# EAGLE board Door-inner-V0 (EAGLE 9.2.0)
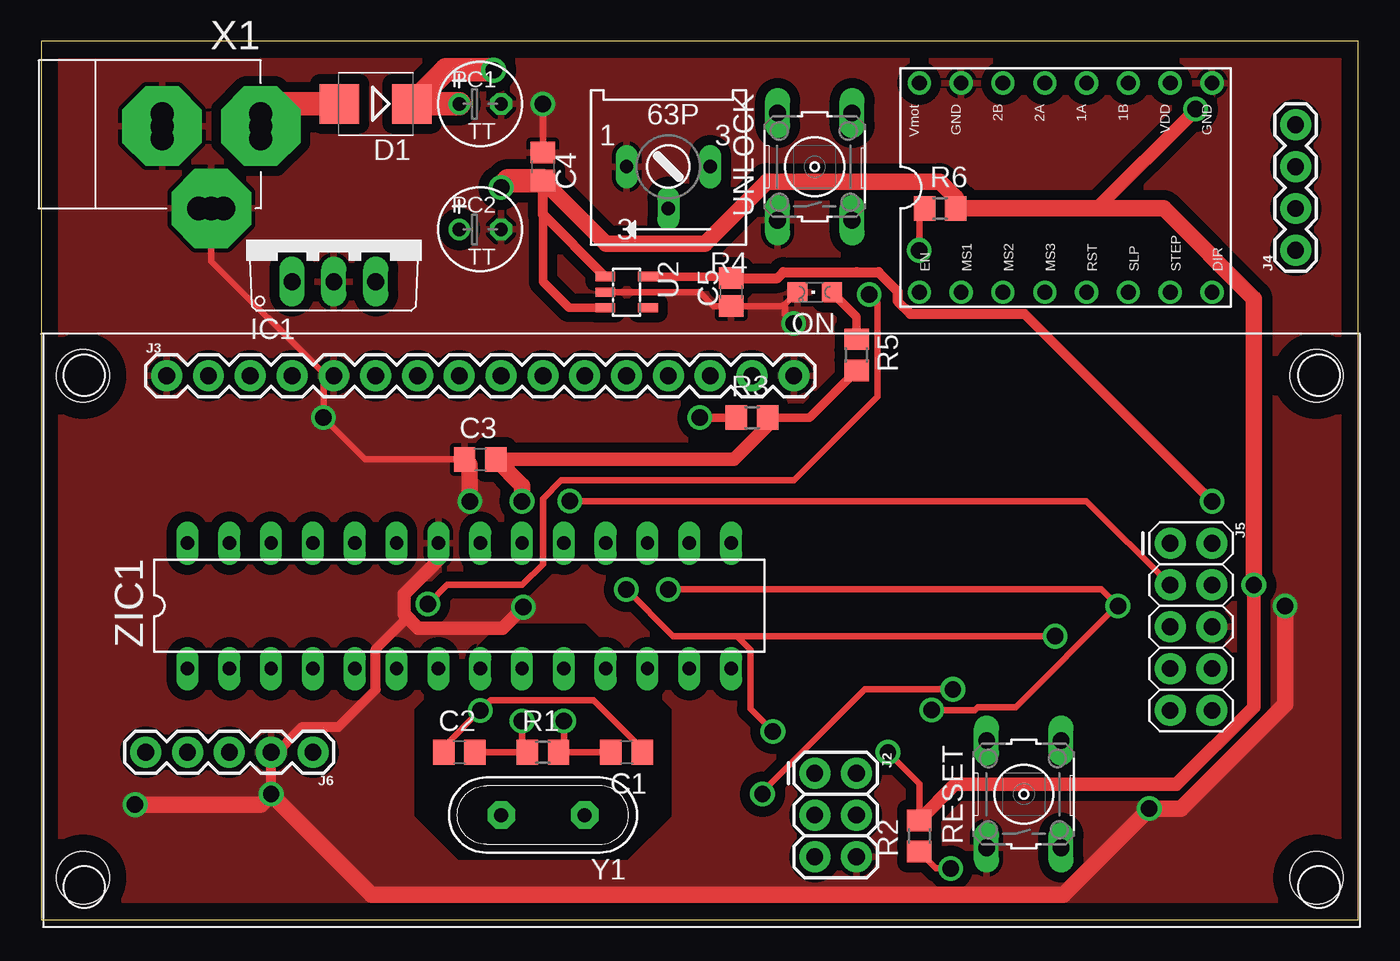
[diagram p0: board, top side]
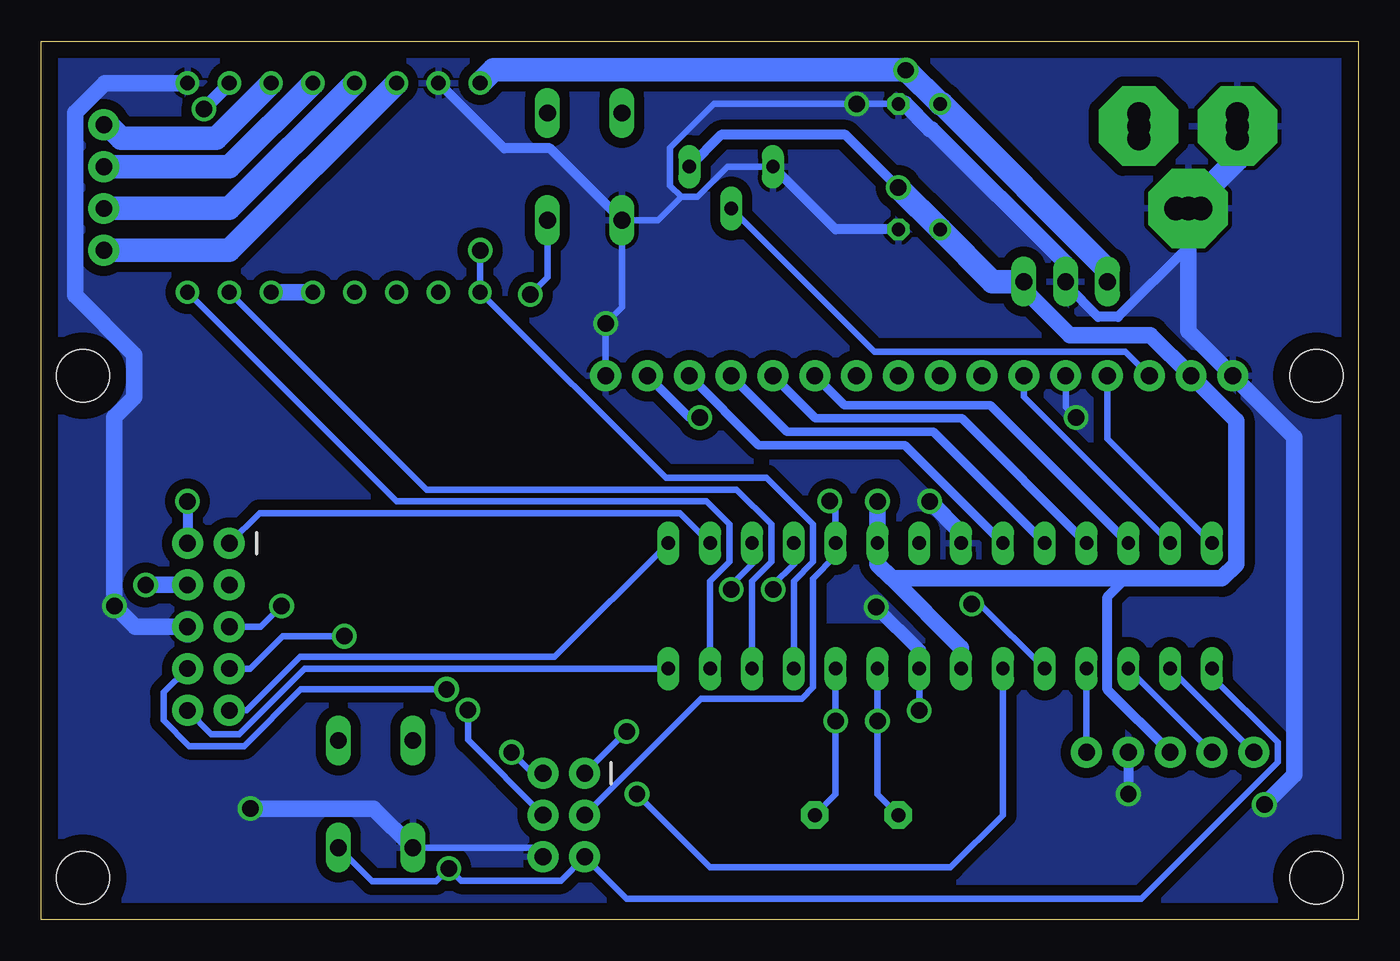
[diagram p1: board, bottom side, seen from below]

Size 80.01 x 53.34 mm. Coordinates in mm from the lower left corner, seen from the top.
Outline: 0,0 80.01,0 80.01,53.34 0,53.34 0,0
Copper layers (1*16): Top 0.035mm / dielectric 1.5mm / Bottom 0.035mm
Design rules "default *": minimum track width 16mil, minimum drill 0.4mm, track to track 12mil, track to pad 12mil, pad to pad 12mil, via to via 12mil, smd to smd 12mil, copper to edge 40mil, drill to drill 6mil, minimum pad ring 10mil, minimum via ring 8mil, stop-mask expansion 4mil, vias tented up to drill 0mil, thermal gap 10mil
Net classes: 1 power: width 0.406 mm; 2 gnd: width 0.406 mm; 3 vin: width 1.422 mm
Holes 3.2 mm at 77.47,33.02 77.47,2.54 2.54,2.54 2.54,33.02

## Footprints (pad centres in the part's own frame; a part is rotated, then mirrored left to right if it is on the bottom)
C0805 = smd 1.3 x 1.5: 1 -0.95,0; 2 0.95,0
C0805' = smd 1.3 x 1.5: 1 -0.85,0; 2 0.85,0
SMB = smd 2.4 x 2.4: A 2.2,0; C -2.2,0
TO220V = drill 1.016 long: 1 -2.54,-2.54; 2 0,-2.54; 3 2.54,-2.54
2X3 = drill 1.016 pad 1.88: 1 0,0; 2 0,2.54; 3 2.54,0; 4 2.54,2.54; 5 5.08,0; 6 5.08,2.54
LCD-16X2 = drill 1.016 pad 1.88: 1 0,0; 2 2.54,0; 3 5.08,0; 4 7.62,0; 5 10.16,0; 6 12.7,0; 7 15.24,0; 8 17.78,0; 9 20.32,0; 10 22.86,0; 11 25.4,0; 12 27.94,0; 13 30.48,0; 14 33.02,0; 15 35.56,0; 16 38.1,0
1X04 = drill 1.016 pad 1.88: 1 0,0; 2 2.54,0; 3 5.08,0; 4 7.62,0
2X5 = drill 1.016 pad 1.88: 1 0,0; 2 0,2.54; 3 2.54,0; 4 2.54,2.54; 5 5.08,0; 6 5.08,2.54; 7 7.62,0; 8 7.62,2.54; 9 10.16,0; 10 10.16,2.54
1X05 = drill 1.016 pad 1.88: 1 0,0; 2 2.54,0; 3 5.08,0; 4 7.62,0; 5 10.16,0
CHIPLED_0805 = smd 1.2 x 1.2: A 0,-1.05; C 0,1.05
TT2D5 = drill 0.813: + -1.27,0 | drill 0.813 octagon: - 1.27,0
R0805 = smd 1.3 x 1.5: 1 -0.95,0; 2 0.95,0
S63P = drill 0.813 long: A 2.54,0; E -2.54,0; S 0,2.54
B3F-10XX = drill 1.016 long: 1 -3.251,2.261; 2 3.251,2.261; 3 -3.251,-2.261; 4 3.251,-2.261
SOT23-DBV = smd 0.55 x 1.2: 1 -0.95,-1.3; 2 0,-1.3; 3 0.95,-1.3; 4 0.95,1.3; 5 -0.95,1.3
A4988BREAKOUT = drill 0.9: 1A 8.89,1.27; 1B 11.43,1.27; 2A 6.35,1.27; 2B 3.81,1.27; DIR 16.51,-11.43; EN -1.27,-11.43; GND 16.51,1.27; GND@0 1.27,1.27; MS1 1.27,-11.43; MS2 3.81,-11.43; MS3 6.35,-11.43; RST 8.89,-11.43; SLP 11.43,-11.43; STEP 13.97,-11.43; VDD 13.97,1.27; VMOT -1.27,1.27
POWERSUPPLY_DC-21MM = drill 1.4 pad 4.826 octagon: 1 -5.08,-3.353; 2 -0.076,-6.35; 3 -0.076,-0.356 | drill 1.4: 4 -5.08,-4.115; 5 -5.08,-2.591; 6 -0.838,-0.356; 7 0.686,-0.356; 8 -0.838,-6.35; 9 0.686,-6.35
QS = drill 0.85 pad 1.676 octagon: 1 -2.54,0; 2 2.54,0
DIL28-3 = drill 0.813 long: 1 -16.51,-3.81; 2 -13.97,-3.81; 3 -11.43,-3.81; 4 -8.89,-3.81; 5 -6.35,-3.81; 6 -3.81,-3.81; 7 -1.27,-3.81; 8 1.27,-3.81; 9 3.81,-3.81; 10 6.35,-3.81; 11 8.89,-3.81; 12 11.43,-3.81; 13 13.97,-3.81; 14 16.51,-3.81; 15 16.51,3.81; 16 13.97,3.81; 17 11.43,3.81; 18 8.89,3.81; 19 6.35,3.81; 20 3.81,3.81; 21 1.27,3.81; 22 -1.27,3.81; 23 -3.81,3.81; 24 -6.35,3.81; 25 -8.89,3.81; 26 -11.43,3.81; 27 -13.97,3.81; 28 -16.51,3.81

## Placement (x,y rotation side)
C1  22p  [C0805]  35.56,10.16 180 top
C2  22p  [C0805]  25.4,10.16 0 top
C3  100n  [C0805]  26.67,27.94 0 top
C4  100n  [C0805']  30.48,45.72 270 top
C5  1u  [C0805']  41.91,38.1 90 top
D1  M7  [SMB]  20.32,49.53 180 top
IC1  7815TV  [TO220V]  17.78,41.27 0 top
J2  AVR_SPI_PROG_3X2PTH  [2X3]  46.99,8.89 270 top
J3  LCD_4PIN  [LCD-16X2]  7.62,33.02 0 top
J4  [1X04]  76.2,40.64 90 top
J5  [2X5]  68.58,22.86 270 top
J6  [1X05]  16.51,10.16 180 top
ON  [CHIPLED_0805]  46.99,38.1 90 top
PC1  47u  [TT2D5]  26.67,49.53 0 top
PC2  47u  [TT2D5]  26.67,41.91 0 top
R1  1M  [R0805]  30.48,10.16 0 top
R2  10k  [R0805]  53.34,5.08 90 top
R3  220  [R0805]  43.18,30.48 0 top
R4  [S63P]  38.1,45.72 180 top
R5  470  [R0805]  49.53,34.29 270 top
R6  10k  [R0805]  54.61,43.18 0 top
RESET  [B3F-10XX]  59.69,7.62 90 top
U2  LP2985-33DBVR  [SOT23-DBV]  35.56,38.1 270 top
U$1  A4988BREAKOUT  [A4988BREAKOUT]  54.61,49.53 0 top
UNLOCK  [B3F-10XX]  46.99,45.72 90 top
X1  POWERSUPPLY_DC21MMX  [POWERSUPPLY_DC-21MM]  6.99,48.26 90 top
Y1  16MHz  [QS]  30.48,6.35 180 top
ZIC1  ATMEGA8  [DIL28-3]  25.4,19.05 0 top

## Library data of the parts
C1-C3 R1-R3 R5 R6 = resistor
C4 C5 X1 Y1 = SmartPrj
D1 = diode
IC1 = linear
J2 J6 = SparkFun-Connectors
J3 = lcd
J4 = SparkFun-Connectors; PROD_ID: CONN-09696
J5 = SparkFun-Connectors; PROD_ID: CONN-08499; SF_ID: PRT-0778
ON = led
PC1 PC2 = rcl
R4 = pot
RESET UNLOCK = switch-omron; MPN: B3F-1000; OC_FARNELL: 176432; OC_NEWARK: 36M3542
U2 = texas
U$1 = RepRapjr
ZIC1 = atmel

## Nets
+3V3: C5.2 J5.2 U2.5
+5V [power]: C3.2 C4.2 IC1.3 J2.2 J3.2 J5.4 J6.3 PC2.+ R2.2 R3.2 R4.E R5.2 R6.2 U2.1 U2.3 U$1.VDD ZIC1.7 ZIC1.20
BUZ: J5.10 ZIC1.14
D4: J3.11 ZIC1.26
D5: J3.12 ZIC1.25
D6: J3.13 ZIC1.24
D7: J3.14 ZIC1.23
GND [gnd]: C1.1 C2.1 C3.1 C4.1 C5.1 IC1.2 J2.6 J3.1 J3.5 J3.16 J5.6 J6.2 ON.C PC1.- PC2.- R4.A RESET.1 U2.2 U$1.GND U$1.GND@0 UNLOCK.1 X1.1 X1.3 ZIC1.8 ZIC1.22
LCD-EN: J3.6 ZIC1.27
LCD-RS: J3.4 ZIC1.28
M-DIR: U$1.DIR ZIC1.13
M-EN: R6.1 U$1.EN ZIC1.11
M-STP: U$1.STEP ZIC1.12
MISO: J2.1 J5.7 ZIC1.18
MOSI: J2.4 J5.5 ZIC1.17
N$1: J6.1 ZIC1.4
N$2: J6.4 ZIC1.3
N$3: J6.5 ZIC1.2
N$4: J3.15 R3.1
N$5: J3.3 R4.S
N$6: ON.A R5.1
N$7: U$1.RST U$1.SLP
N$8: J4.1 U$1.2B
N$9: J4.2 U$1.2A
N$10: J4.3 U$1.1A
N$11: J4.4 U$1.1B
N$12: UNLOCK.3 ZIC1.5
PWRIN [vin]: D1.A X1.2
RESET: J2.5 R2.1 RESET.3 ZIC1.1
RST: J5.9 ZIC1.15
SCK: J2.3 J5.3 ZIC1.19
SDA: J5.1 ZIC1.16
STATUS: J5.8 ZIC1.6
VIN [vin]: D1.C IC1.1 PC1.+ U$1.VMOT
XTAL1: C2.2 R1.1 Y1.2 ZIC1.9
XTAL2: C1.2 R1.2 Y1.1 ZIC1.10

## Tracks (layer width: path | path; a pad name or v marks a point on that pad's centre or on a via)
+3V3  (via drill 1 pad 0.6)
  Top 0.508: U2.5 41.81,39.05 C5.2
  Top 0.61: C5.2 44.73,38.95 45.09,39.31 49.53,39.31 50.86,39.31 52.03,38.14 52.03,37.56 52.8,36.79 59.73,36.79 v71.12,25.4
  Bottom 0.61: v71.12,25.4 J5.2
+5V  (via drill 1, 1 pad 0.6)
  Top 0.406: R2.2 53.34,8.25 v51.44,10.16
  Top 0.508: U2.3 32.06,37.15 30.48,38.73 30.48,42.83 | R3.2 46.67,30.48 R5.2
  Top 0.61: U2.1 30.48,42.83 C4.2
  Top 0.813: 64.14,43.18 69.97,49.02 69.97,49.06 v70.12,49.21 | R3.2 44.13,29.97 42.1,27.94 C3.2 | v73.66,20.32 73.66,12.9 68.96,8.2 55.51,8.2 R2.2
  Top 1.016: v29.21,25.4 29.21,26.35 C3.2 | C4.2 34.3,41.05 40.32,41.05 44.08,44.81 54.58,44.81 55.56,43.83 R6.2 64.14,43.18 68.19,43.18 73.66,37.7 v73.66,20.32
  Top 1.422: v27.94,44.45 28.36,44.87 C4.2
  Bottom 0.406: v51.44,10.16 50.16,8.89 J2.2
  Bottom 0.61: v27.94,44.45 31.14,47.65 38.71,47.65 R4.E | 14.12,20.73 15.24,19.6 15.24,13.97 J6.3
  Bottom 0.813: v70.12,49.21 68.58,50.76 U$1.VDD
  Bottom 1.016: v29.21,25.4 ZIC1.20 29.21,21.59 28.35,20.73 | ZIC1.7 24.13,16.51 28.35,20.73 | IC1.3 20.32,38.29 17.52,35.48 12.62,35.48 J3.2 7.42,30.28 7.42,21.59 8.28,20.73 14.12,20.73 28.35,20.73 | v73.66,20.32 J5.4
  Bottom 1.422: IC1.3 22.23,38.73 PC2.+ v27.94,44.45
BUZ
  Bottom 0.406: ZIC1.14 63.99,15.24 67.98,11.25 69.67,11.25 J5.10
D4
  Bottom 0.508: ZIC1.26 22.35,31.24 31.22,31.24 32.99,33.02 J3.11
D5
  Bottom 0.508: ZIC1.25 24.08,30.43 32.97,30.43 J3.12
D6
  Bottom 0.508: ZIC1.24 25.81,29.62 34.7,29.62 J3.13
D7
  Bottom 0.508: ZIC1.23 27.53,28.8 36.42,28.8 J3.14
GND  (via drill 1, 1 pad 0.6)
  Top 0.406: C1.1 36.51,10.38 33.55,13.34 27.3,13.34 v26.67,12.7 24.45,10.48 C2.1 | C3.1 19.68,27.94 v17.14,30.48 17.14,33.16 10.34,39.97 X1.1 | C4.1 v30.48,49.53 | 45.2,37.35 45.09,37.25 C5.1 40.85,37.25 40.01,38.1 U2.2 | 45.2,37.35 ON.C | 45.2,37.35 45.2,36.72 v45.72,36.2
  Top 0.61: v13.97,7.62 13.97,9.81 15.87,11.71 18.06,11.71 20.32,13.97 20.32,16.43 22.03,18.14 22.03,19.05
  Top 0.813: ZIC1.22 24.13,21.87 22.03,19.77 22.03,19.05 22.03,18.56 22.89,17.7 28.02,17.7 v29.29,18.97
  Top 1.016: v26.04,25.4 26.04,27.62 C3.1 | v5.71,6.98 13.34,6.98 v13.97,7.62 20.07,1.52 62.09,1.52 v67.31,6.74 69.22,6.74 75.56,13.09 v75.56,19.05
  Bottom 0.406: J3.5 17.78,31.12 v17.14,30.48 | PC1.- v30.48,49.53 39.14,49.53 41.81,46.86 41.81,44.58 41.12,43.89 | 41.12,43.89 40.16,43.89 38.33,45.72 R4.A | 41.12,43.89 42.55,42.47 UNLOCK.1 44.73,37.19 v45.72,36.2 J3.16 | v26.67,12.7 ZIC1.8 | J2.6 50.09,4.37 RESET.1
  Bottom 0.61: J6.2 v13.97,7.62 | PC2.- 31.75,41.91 R4.A | UNLOCK.1 49.1,46.84 51.88,46.84 55.84,50.8 U$1.GND@0 | IC1.2 17.78,38.57 15.81,36.6 14.61,36.6 10.34,40.87 X1.1
  Bottom 0.813: ZIC1.8 26.67,16.35 v29.29,18.97
  Bottom 1.016: ZIC1.22 24.13,23.49 v26.04,25.4 | IC1.2 17.78,39.86 25.93,48.01 26.03,48.01 27.55,49.53 PC1.- | U$1.GND 76.14,50.8 77.95,48.99 77.95,37.92 74.35,34.31 74.35,31.73 75.56,30.51 v75.56,19.05 74.3,17.78 J5.6 | X1.1 10.34,35.74 J3.1 3.89,29.29 3.89,8.8 v5.71,6.98 | RESET.1 59.8,6.74 v67.31,6.74
  Bottom 1.422: X1.1 7.34,46.18 X1.3
  cutout Bottom (rank 2): 25.4,3.81 22.86,6.35 22.86,12.7 27.94,17.78 33.02,17.78 38.1,12.7 38.1,6.35 35.56,3.81
  pour Bottom (isolate 0.61): 0,1.27 1.27,0 78.74,0 80.01,1.27 80.01,52.07 78.74,53.34 1.27,53.34 0,52.07
  pour Top (isolate 0.61): 0,1.27 1.27,0 78.74,0 80.01,1.27 80.01,52.07 78.74,53.34 1.27,53.34 0,52.07
  cutout Top (rank 2): 25.4,3.81 22.86,6.35 22.86,12.7 27.94,17.78 33.02,17.78 38.1,12.7 38.1,6.35 35.56,3.81
LCD-EN
  Bottom 0.406: ZIC1.27 20.32,31.75 J3.6
LCD-RS
  Bottom 0.406: ZIC1.28 15.24,29.21 J3.4
M-DIR
  Bottom 0.406: ZIC1.13 39.37,20.55 38.2,21.72 38.2,24 39.6,25.4 58.42,25.4 U$1.DIR
M-EN  (via drill 1 pad 0.6)
  Top 0.406: v53.34,40.64 53.34,42.86 R6.1
  Bottom 0.406: v53.34,40.64 U$1.EN 42.06,26.82 35.94,26.82 33.12,24 33.12,21.72 34.29,20.55 ZIC1.11
M-STP
  Bottom 0.406: ZIC1.12 36.83,20.55 35.66,21.72 35.66,24 37.77,26.11 56.59,26.11 U$1.STEP
MISO  (via drill 1)
  Top 0.406: v35.55,20.05 38.39,17.21 42.25,17.21 | 42.25,17.21 v61.59,17.21 | 42.25,17.21 43.08,16.38 43.08,12.8 v44.45,11.43
  Bottom 0.406: J5.7 67.31,15.24 65.34,17.21 v61.59,17.21 | ZIC1.18 34.29,21.59 35.55,20.33 v35.55,20.05 | v44.45,11.43 J2.1
MOSI  (via drill 1)
  Top 0.406: v54.09,12.72 56.72,12.72 56.9,12.9 59.19,12.9 65.34,19.05 v65.41,19.05 64.41,20.05 v38.09,20.05
  Bottom 0.406: ZIC1.17 36.83,21.59 38.09,20.33 v38.09,20.05 | J2.4 54.09,10.91 v54.09,12.72 | J5.5 66.67,17.78 v65.41,19.05
N$1
  Bottom 0.406: J6.1 ZIC1.4
N$2
  Bottom 0.406: J6.4 ZIC1.3
N$3
  Bottom 0.406: J6.5 ZIC1.2
N$4  (via drill 1 pad 0.6)
  Top 0.508: v40.01,30.48 R3.1
  Bottom 0.508: J3.15 40.64,30.48 v40.01,30.48
N$5
  Bottom 0.406: J3.3 14.15,34.47 29.39,34.47 R4.S
N$6
  Top 0.508: ON.A 49.53,36.61 R5.1
N$7
  Bottom 1.016: U$1.RST U$1.SLP
N$8
  Bottom 1.422: U$1.2B 68.58,40.64 J4.1
N$9
  Bottom 1.422: U$1.2A 68.58,43.18 J4.2
N$10
  Bottom 1.422: U$1.1A 68.58,45.72 J4.3
N$11
  Bottom 1.422: U$1.1B 69.39,47.45 75.16,47.45 75.97,48.26 J4.4
N$12  (via drill 1)
  Top 0.406: v50.3,37.95 50.8,37.45 50.8,31.75 45.72,26.67 31.59,26.67 30.48,25.56 30.48,21.59 29.21,20.32 24.65,20.32 v23.5,19.16
  Bottom 0.406: v50.3,37.95 49.25,39 UNLOCK.3 | ZIC1.5 22.97,19.16 v23.5,19.16
PWRIN
  Top 1.422: X1.2 14.68,49.53 D1.A
RESET  (via drill 1)
  Top 0.406: R2.1 54.36,3.11 v55.24,3.11
  Bottom 0.406: ZIC1.1 8.89,14.75 4.9,10.76 4.9,9.56 13.19,1.27 44.45,1.27 J2.5 48.44,2.36 54.5,2.36 v55.24,3.11 56.03,2.32 59.91,2.32 RESET.3
RST
  Bottom 0.406: ZIC1.15 48.82,15.95 64.29,15.95 67.54,12.7 J5.9
SCK  (via drill 1)
  Top 0.406: v32.11,25.41 63.49,25.41 J5.3
  Bottom 0.406: J2.3 39.93,13.41 33.81,13.41 33.12,14.1 33.12,20.71 31.75,22.08 ZIC1.19 31.75,25.05 v32.11,25.41
SDA
  Bottom 0.406: ZIC1.16 41.2,24.69 66.75,24.69 J5.1
STATUS  (via drill 1)
  Top 0.406: v55.38,13.98 50.03,13.98 43.81,7.76 v43.81,7.62
  Bottom 0.406: ZIC1.6 21.59,6.35 24.77,3.17 39.37,3.17 v43.81,7.62 | J5.8 72.57,13.79 72.57,12.1 71.01,10.54 67.69,10.54 64.25,13.98 v55.38,13.98
VIN  (via drill 1)
  Top 1.422: PC1.+ D1.C 24.6,51.61 27.44,51.61 v27.48,51.57
  Bottom 1.422: U$1.VMOT 52.53,51.61 27.48,51.61 PC1.+ 25.3,49.53 15.24,39.47 IC1.1
XTAL1  (via drill 1 pad 0.6)
  Top 0.406: v29.21,12.06 29.21,10.48 R1.1 C2.2
  Bottom 0.406: ZIC1.9 v29.21,12.06 29.21,7.62 Y1.2
XTAL2  (via drill 1 pad 0.6)
  Top 0.406: v31.75,12.06 31.75,10.48 R1.2 C1.2
  Bottom 0.406: Y1.1 31.75,7.62 v31.75,12.06 ZIC1.10